# Altium PCB NBP14 Xilinx CoolRunner PQ208 Rev1.01.PcbDoc (part 2 of 2)
Units mm, origin at the board's own origin, x right, y up, seen from the top; angles counter-clockwise.
Board outline 69 x 80.99 mm, 2 copper layers (Top Layer, Bottom Layer); 33 components, 179 nets, 478 pads, 87 vias.
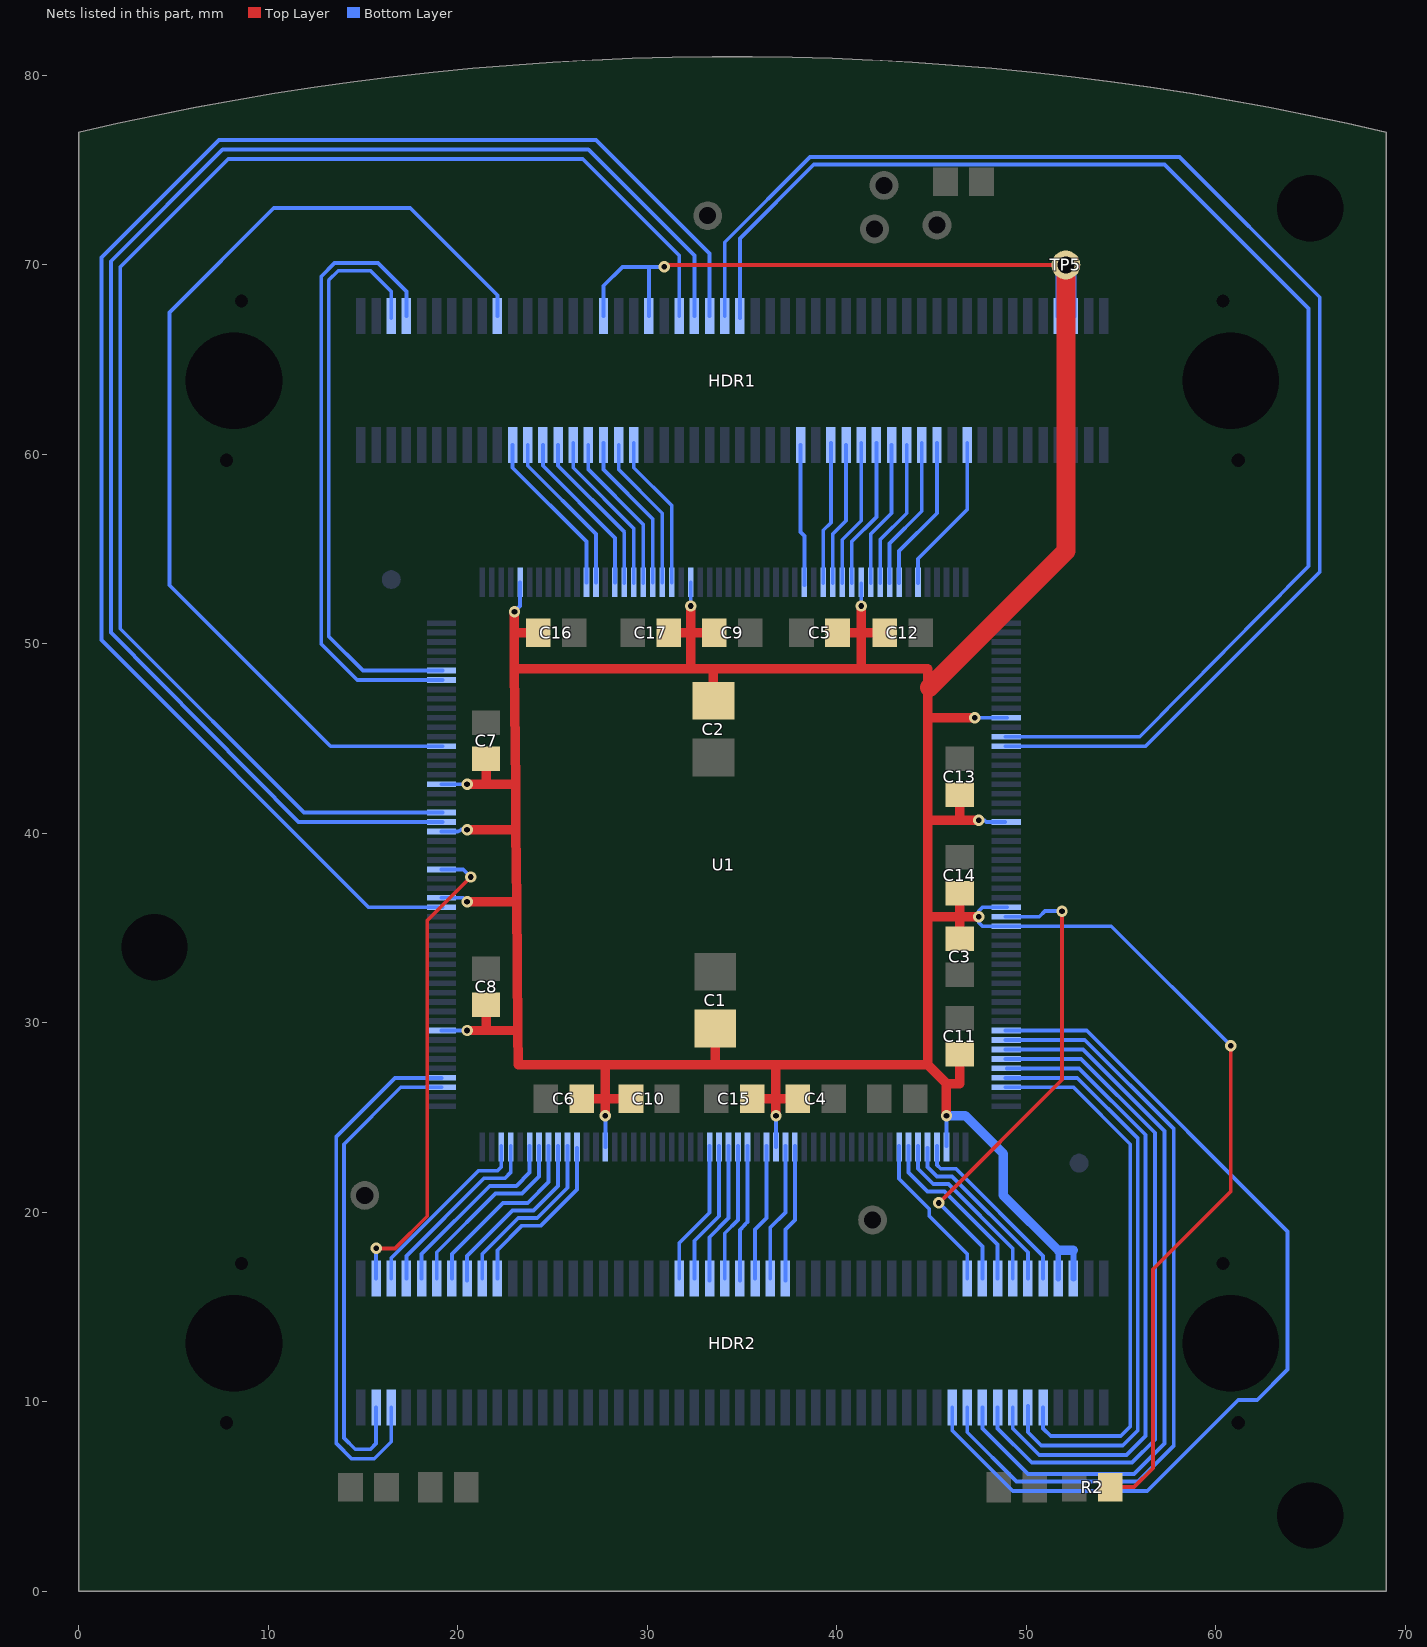
[diagram p2: the nets of this part, all layers, seen from the top]

## Via types
v1: diameter 0.6, hole 0.3, Top Layer to Bottom Layer, tented both sides, 85 vias
v2: diameter 0.9, hole 0.5, Top Layer to Bottom Layer, tented both sides, 2 vias

## Nets (pads, with @x,y where several pads share a name; then routed paths per layer and width w, separated by ;. In a path a pad name is that pad's centre, name@x,y a point inside that pad or via, vN(x,y) a via of type N, cw(c..) or ccw(c..) an arc to the next point about the centre after c; other vN are vias at no path point) (continued)
RAM_ADDR0: HDR1.21 U1.12 | length 8.9
  Bottom Layer w0.2: HDR1.21@22.9,60.5 22.9,59.3 26.8,55.4 U1.12@26.8,53.25
RAM_ADDR1: HDR1.25 U1.15 | length 8.8
  Bottom Layer w0.2: HDR1.25@24.5,60.5 24.5,59.4 28.3,55.6 U1.15@28.3,53.25
RAM_ADDR2: HDR1.29 U1.17 | length 8.7
  Bottom Layer w0.2: HDR1.29@26.1,60.6 HDR1.29@26.1,60.5 26.1,59.3 29.3,56.1 U1.17@29.3,53.2
RAM_ADDR3: HDR1.33 U1.19 | length 8.4
  Bottom Layer w0.2: HDR1.33@27.7,60.6 27.7,59.2 30.3,56.6 U1.19@30.3,53.25
RAM_ADDR4: HDR1.65 U1.38 | length 7.6
  Bottom Layer w0.2: U1.38@39.8,53.2 39.8,55.8 40.5,56.5 HDR1.65@40.5,60.5
RAM_ADDR5: HDR1.69 U1.40 | length 7.9
  Bottom Layer w0.2: U1.40@40.8,53.2 40.8,55.4 42.1,56.7 HDR1.69@42.1,60.6
RAM_ADDR6: HDR1.73 U1.43 | length 7.9
  Bottom Layer w0.2: U1.43@42.3,53.2 42.3,55.5 43.7,56.9 HDR1.73@43.7,60.5
RAM_ADDR7: HDR1.77 U1.45 | length 8.2
  Bottom Layer w0.2: U1.45@43.3,53.2 43.3,54.9 45.3,56.9 HDR1.77@45.3,60.5 HDR1.77@45.3,60.6
RAM_ADDR8: HDR1.75 U1.44 | length 8.1
  Bottom Layer w0.2: U1.44@42.8,53.2 42.8,55.3 44.5,57 HDR1.75@44.5,60.6
RAM_ADDR9: HDR1.71 U1.42 | length 7.8
  Bottom Layer w0.2: U1.42@41.8,53.2 41.8,55.8 42.9,56.9 HDR1.71@42.9,60.5
RAM_ADDR10: HDR1.67 U1.39 | length 7.8
  Bottom Layer w0.2: U1.39@40.3,53.2 40.3,55.5 41.3,56.5 HDR1.67@41.3,60.6
RAM_ADDR11: HDR1.63 U1.37 | length 7.6
  Bottom Layer w0.2: U1.37@39.3,53.2 39.3,56 39.7,56.4 HDR1.63@39.7,60.6
RAM_ADDR12: HDR1.59 U1.35 | length 7.5
  Bottom Layer w0.2: HDR1.59@38.1,60.5 38.1,55.9 38.3,55.7 U1.35@38.3,53.1
RAM_ADDR13: HDR1.35 U1.20 | length 8.2
  Bottom Layer w0.2: HDR1.35@28.5,60.5 28.5,59.2 30.8,56.9 U1.20@30.8,53.25
RAM_ADDR14: HDR1.31 U1.18 | length 8.5
  Bottom Layer w0.2: HDR1.31@26.9,60.5 26.9,59.2 29.8,56.3 U1.18@29.8,53.2
RAM_ADDR15: HDR1.27 U1.16 | length 8.7
  Bottom Layer w0.2: HDR1.27@25.3,60.5 25.3,59.4 28.8,55.9 U1.16@28.8,53.2
RAM_ADDR16: HDR1.23 U1.13 | length 8.7
  Bottom Layer w0.2: HDR1.23@23.7,60.5 23.7,59.4 27.3,55.8 U1.13@27.3,53.25
RAM_CS: HDR1.37 U1.21 | length 8.2
  Bottom Layer w0.2: HDR1.37@29.3,60.6 29.3,59.3 31.3,57.3 U1.21@31.3,53.25
RED0: HDR1.6 U1.203 | length 30.9
  Bottom Layer w0.2: HDR1.6@16.5,67.2 16.5,68.6 15.4,69.7 13.7,69.7 13.2,69.2 13.2,50.4 15,48.6 U1.203@19.2,48.6
RED1: HDR1.8 U1.202 | length 33.3
  Bottom Layer w0.2: HDR1.8@17.3,67.3 17.3,68.6 15.8,70.1 13.5,70.1 12.8,69.4 12.8,50 14.7,48.1 U1.202@19.2,48.1
REF_CLK: HDR2.4 U1.182 | length 25.7
  Top Layer w0.2: v1(15.7,18.1) 16.7,18.1 18.4,19.8 18.4,35.4 v1@20.8,37.8
  Bottom Layer w0.2: HDR2.4@15.7,16.5 v1(15.7,18.1) ; U1.182@19.15,38.1 20.3,38.1 v1(20.7,37.7)
SCL: HDR2.5 U1.160 | length 28.4
  Bottom Layer w0.2: HDR2.5@16.5,9.7 16.5,7.9 15.6,7 14.4,7 13.6,7.8 13.6,24 16.7,27.1 U1.160@19.15,27.1
SDA: HDR2.3 U1.159 | length 25.9
  Bottom Layer w0.2: HDR2.3@15.7,9.7 15.7,7.8 15.4,7.5 14.6,7.5 14,8.1 14,23.6 17,26.6 U1.159@19.15,26.6
SP0: HDR2.79 U1.96 | length 49.5
  Bottom Layer w0.2: HDR2.79@46.1,9.7 46.1,8.5 49.3,5.3 56.4,5.3 61.2,10.1 62.2,10.1 63.8,11.7 63.8,19 53.2,29.6 U1.96@48.9,29.6
SP1: HDR2.81 U1.97 | length 41.6
  Bottom Layer w0.2: HDR2.81@46.9,9.7 46.9,8.4 49.5,5.8 55.9,5.8 57.8,7.7 57.8,24.4 53.1,29.1 U1.97@48.9,29.1
SP2: HDR2.83 U1.98 | length 39
  Bottom Layer w0.2: HDR2.83@47.7,9.7 47.7,8.6 50.1,6.2 55.7,6.2 57.3,7.8 57.3,24.3 53,28.6 U1.98@48.9,28.6
SP3: HDR2.85 U1.99 | length 36.4
  Bottom Layer w0.2: HDR2.85@48.5,9.7 48.5,8.6 50.3,6.8 55.6,6.8 56.8,8 56.8,24.2 52.9,28.1 U1.99@48.9,28.1
SP4: HDR2.87 U1.100 | length 33.7
  Bottom Layer w0.2: U1.100@49,27.6 52.8,27.6 56.3,24.1 56.3,8.2 55.3,7.2 50.7,7.2 49.3,8.6 HDR2.87@49.3,9.7
SP5: HDR2.89 U1.101 | length 31.5
  Bottom Layer w0.2: U1.101@48.9,27.1 52.7,27.1 55.9,23.9 55.9,8.5 55.1,7.7 50.8,7.7 50.1,8.4 HDR2.89@50.1,9.8
SP6: HDR2.91 U1.102 | length 28.8
  Bottom Layer w0.2: U1.102@48.9,26.6 52.5,26.6 55.5,23.6 55.5,8.7 55,8.2 51.3,8.2 50.9,8.6 HDR2.91@50.9,9.7
SP7: HDR2.92 U1.108 | length 9.8
  Bottom Layer w0.2: U1.108@45.3,23.5 45.3,22.5 45.5,22.3 46.3,22.3 50.9,17.7 HDR2.92@50.9,16.5
SP8: HDR2.90 U1.109 | length 9.6
  Bottom Layer w0.2: U1.109@44.8,23.4 44.8,22.4 45.3,21.9 46.1,21.9 50.1,17.9 HDR2.90@50.1,16.5
SP9: HDR2.88 U1.110 | length 9.5
  Bottom Layer w0.2: U1.110@44.3,23.5 44.3,22.3 45.1,21.5 45.9,21.5 49.3,18.1 HDR2.88@49.3,16.5
SP10: HDR2.86 U1.111 | length 9.5
  Bottom Layer w0.2: U1.111@43.8,23.5 43.8,22.1 44.8,21.1 45.7,21.1 48.5,18.3 HDR2.86@48.5,16.5
SP11: HDR2.84 U1.84 | length 26.2
  Top Layer w0.2: v1(45.4,20.5) 51.9,27 v1(51.9,35.9)
  Bottom Layer w0.2: v1(45.4,20.5) 47.7,18.2 HDR2.84@47.7,16.5 ; U1.84@48.9,35.6 50.7,35.6 51,35.9 v1(51.9,35.9)
SP12: HDR2.82 U1.112 | length 8.5
  Bottom Layer w0.2: U1.112@43.3,23.5 43.3,21.774 44.89,20.184 44.89,19.81 46.9,17.8 HDR2.82@46.9,16.5
SPI_CLK: HDR1.46 U1.187 | length 80
  Bottom Layer w0.2: U1.187@19.2,40.6 11.6,40.6 1.7,50.6 1.7,70.2 7.6,76.1 26.9,76.1 32.5,70.5 HDR1.46@32.5,67.3
SPI_DIN: HDR1.44 U1.188 | length 77.3
  Bottom Layer w0.2: U1.188@19.2,41.1 11.9,41.1 2.2,50.8 2.2,69.9 7.9,75.6 26.6,75.6 31.7,70.5 HDR1.44@31.7,67.3
SPI_DOUT: HDR1.50 U1.66 | length 75.1
  Bottom Layer w0.2: HDR1.50@34.1,67.3 34.1,71.2 38.6,75.7 58.1,75.7 65.5,68.3 65.5,53.8 56.3,44.6 U1.66@48.9,44.6
SPI_MODE: HDR1.52 U1.65 | length 72.3
  Bottom Layer w0.2: HDR1.52@34.9,67.2 34.9,71.4 38.8,75.3 57.3,75.3 64.9,67.7 64.9,54.1 56,45.1 U1.65@48.9,45.1
SPI_SEL: HDR1.48 U1.178 | length 84.5
  Bottom Layer w0.2: U1.178@19.2,36.1 15.3,36.1 1.2,50.2 1.2,70.4 7.4,76.6 27.3,76.6 33.3,70.6 HDR1.48@33.3,67.3
SW0: HDR2.44 U1.132 | length 7.7
  Bottom Layer w0.2: HDR2.44@31.7,16.5 31.7,18.385 33.307,19.993 ; 33.3,20 U1.132@33.3,23.5
SW1: HDR2.46 U1.131 | length 7.5
  Bottom Layer w0.2: HDR2.46@32.5,16.5 32.5,18.5 33.8,19.8 U1.131@33.8,23.5
SW2: HDR2.48 U1.130 | length 7.5
  Bottom Layer w0.2: HDR2.48@33.3,16.4 33.3,18.691 34.3,19.7 U1.130@34.3,23.5
SW3: HDR2.50 U1.129 | length 7.3
  Bottom Layer w0.2: HDR2.50@34.1,16.5 34.1,18.9 34.8,19.6 U1.129@34.8,23.5
SW4: HDR2.52 U1.128 | length 7.3
  Bottom Layer w0.2: HDR2.52@34.9,16.4 34.9,19.077 35.3,19.5 U1.128@35.3,23.5
SW5: HDR2.54 U1.126 | length 7.2
  Bottom Layer w0.2: HDR2.54@35.7,16.5 35.7,19.1 36.3,19.7 U1.126@36.3,23.5
SW6: HDR2.56 U1.124 | length 7.3
  Bottom Layer w0.2: HDR2.56@36.5,16.5 36.5,19.2 37.3,20 U1.124@37.3,23.5
SW7: HDR2.58 U1.123 | length 7.3
  Bottom Layer w0.2: HDR2.58@37.3,16.4 37.3,19.1 37.8,19.6 U1.123@37.8,23.5
SWC0: HDR2.18 U1.147 | length 9.4
  Bottom Layer w0.2: HDR2.18@21.3,16.5 21.3,17.8 23.2,19.7 24.2,19.7 25.8,21.3 U1.147@25.8,23.5
SWC1: HDR2.16 U1.148 | length 9.7
  Bottom Layer w0.2: HDR2.16@20.5,16.4 20.5,17.7 22.9,20.1 24,20.1 25.3,21.4 U1.148@25.3,23.5
SWC2: HDR2.14 U1.149 | length 9.9
  Bottom Layer w0.2: HDR2.14@19.7,16.5 19.7,17.8 22.4,20.5 23.7,20.5 24.8,21.6 U1.149@24.8,23.5
SWC3: HDR2.6 U1.154 | length 10
  Bottom Layer w0.2: HDR2.6@16.5,16.5 16.5,17.6 21.1,22.2 22.1,22.2 22.3,22.4 U1.154@22.3,23.5
SWR0: HDR2.20 U1.146 | length 9.2
  Bottom Layer w0.2: HDR2.20@22.1,16.5 22.1,18 23.4,19.3 24.4,19.3 26.3,21.2 U1.146@26.3,23.4
SWR1: HDR2.12 U1.150 | length 10.1
  Bottom Layer w0.2: HDR2.12@18.9,16.5 18.9,17.9 22,21 23.4,21 24.3,21.9 U1.150@24.3,23.5
SWR2: HDR2.10 U1.151 | length 10.2
  Bottom Layer w0.2: HDR2.10@18.1,16.5 18.1,17.8 21.7,21.4 23.1,21.4 23.8,22.1 U1.151@23.8,23.5
SWR3: HDR2.8 U1.153 | length 9.9
  Bottom Layer w0.2: HDR2.8@17.3,16.5 17.3,17.7 21.4,21.8 22.5,21.8 22.8,22.1 U1.153@22.8,23.5
TEST: HDR1.81 U1.47 | length 8.5
  Bottom Layer w0.2: U1.47@44.3,53.2 44.3,54.5 46.9,57.1 HDR1.81@46.9,60.5 HDR1.81@46.9,60.6
VCC: C1.1 C2.1 C3.1 C4.1 C5.1 C6.1 C7.1 C8.1 C9.1 C10.1 C11.1 C12.1 C13.1 C14.1 C15.1 C16.1 C17.1 HDR1.34 HDR1.40 HDR1.94 HDR1.96 HDR2.94 HDR2.96 R2.1 TP5.1 U1.5 U1.23 U1.41 U1.63 U1.74 U1.83 U1.85 U1.107 U1.125 U1.143 U1.165 U1.179 U1.186 U1.191 | length 281.7
  Top Layer w0.2: v1(30.9,69.9) 31,70 31.3,70 TP5.1@52.2,70 ; R2.1@54.4,5.5 55.7,5.5 56.7,6.5 56.7,17 60.8,21.1 v1(60.8,28.8)
  Top Layer w0.5: v1(20.5,29.6) 23.182,29.6 ; v1(20.5,36.4) 23.117,36.4 ; v1(20.5,40.2) 23.081,40.2 ; v1(20.5,42.6) 23.058,42.6 ; 21.5,29.6 C8.1@21.5,30.9 ; 21.5,42.6 C7.1@21.5,44 ; 23,50.6 C16.1@24.3,50.6 ; v1(23,51.7) 23,48.7 ; C6.1@26.5,26 27.8,26 C10.1@29.2,26 ; v1(27.8,25.1) 27.8,27.7 ; C17.1@31.1,50.6 C9.1@33.6,50.6 ; 32.3,48.7 32.3,50.6 v1(32.3,52) ; C2.1@33.5,46.9 33.5,48.7 ; 33.6,27.8 C1.1@33.6,29.7 ; C15.1@35.5,26 C4.1@38,26 ; v1(36.8,25.1) 36.8,27.8 ; C5.1@40.1,50.6 C12.1@42.6,50.6 ; 41.3,48.7 v1(41.3,52) ; 44.8,35.6 v1(47.5,35.6) ; 44.8,40.7 v1(47.5,40.7) ; 44.8,46.1 v1(47.3,46.1) ; v1(45.8,25.1) 45.8,26.8 ; C11.1@46.5,28.3 46.5,26.8 45.8,26.8 ; C3.1@46.5,34.4 C14.1@46.5,36.8 ; 46.5,40.7 C13.1@46.5,42 ; 23,48.7 44.8,48.7 44.8,27.8 ; 23,48.7 23.058,42.6 ; 23.058,42.6 23.081,40.2 ; 23.081,40.2 23.117,36.4 ; 23.117,36.4 23.182,29.6 ; 23.182,29.6 23.2,27.8 44.8,27.8 ; 44.8,27.8 45.8,26.8
  Top Layer w1: 44.9,47.7 52.1,54.9 TP5.1@52.1,70
  Bottom Layer w0.2: U1.165@19.15,29.6 v1(20.5,29.6) ; U1.179@19.15,36.6 20.3,36.6 v1(20.5,36.4) ; U1.186@19.15,40.1 20,40.1 20.2,40.2 v1(20.5,40.2) ; U1.191@19.15,42.6 v1(20.5,42.6) ; v1(23,51.7) 23.3,52 U1.5@23.3,53.25 ; HDR1.34@27.7,67.3 27.7,68.9 28.7,69.9 30.1,69.9 ; U1.143@27.8,23.45 v1(27.8,25.1) ; HDR1.40@30.1,67.3 30.1,67.6 30.1,69.9 ; v1(30.9,69.9) 30.1,69.9 ; v1(32.3,52) U1.23@32.3,53.25 ; U1.125@36.8,23.45 v1(36.8,25.1) ; v1(41.3,52) U1.41@41.3,53.2 ; U1.107@45.8,23.5 v1(45.8,25.1) ; v1(47.3,46.1) U1.63@49,46.1 ; v1(47.5,40.7) 47.8,40.7 47.9,40.6 U1.74@48.9,40.6 ; U1.83@49,36.1 47.7,36.1 47.5,35.9 47.5,35.3 47.7,35.1 54.5,35.1 v1(60.8,28.8)
  Bottom Layer w0.3: HDR2.94@51.7,16.5 51.7,18 ; HDR1.94@51.7,67.3 TP5.1@51.7,70 ; HDR2.96@52.5,16.5 52.5,18 ; HDR1.96@52.5,67.3 TP5.1@52.5,70
  Bottom Layer w0.5: v1(45.8,25.1) 46.8,25.1 48.8,23.1 48.8,20.9 51.7,18 52.5,18
VDRIVE: HDR1.20 U1.195 | length 54.9
  Bottom Layer w0.2: U1.195@19.2,44.6 13.3,44.6 4.8,53.1 4.8,67.5 10.3,73 17.5,73 22.1,68.4 HDR1.20@22.1,67.3
pads on no net: HDR1.91 HDR1.93 HDR1.95 HDR1.97 HDR1.99 HDR1.MH1 HDR1.MH2 HDR1.MH3 HDR1.MH4 HDR1.MH5 HDR1.MH6 HDR2.76 HDR2.78 HDR2.80 HDR2.93 HDR2.95 HDR2.97 HDR2.99 HDR2.MH1 HDR2.MH2 HDR2.MH3 HDR2.MH4 HDR2.MH5 HDR2.MH6 U1.1 U1.2 U1.51 U1.52 U1.53 U1.54 U1.103 U1.104 U1.105 U1.106 U1.155 U1.156 U1.157 U1.158 U1.207 U1.208

## Polygon pours and split planes (outlines as drawn)
VCC on Top Layer "Top Layer-VCC" (solid, remove dead copper, pour order 1001): 21.6,50.3 46.5,50.3 46.5,26.1 21.6,26.1
GND on Top Layer "Top Layer-GND" (solid, remove dead copper, pour order 1000): 0,0 69,0 69,81 0,81
GND on Bottom Layer "Bottom Layer-GND" (solid, remove dead copper, pour order 1002): 0,0 69,0 69,81 0,81

## Keep-outs
Bottom Layer:
  circle w0.2: c16.5,53.4 r2
  circle w0.2: c52.8,22.6 r2
Keep-Out Layer:
  lines w1.8: 68.999,77 ccw(c34.5,-69.801) 0.001,77 0,0 69,0 ; 69.1,0 69.1,77

## Other copper
Bottom Layer:
  rectangle net VCC: 51.6,68.6 52.6,70.6

## Silkscreen, mask and mechanical layers (free items; w line width, h text height)
Top Overlay:
  circle w0.127: c65,73 r2.5
  circle w0.127: c65,4 r2.5
  circle w0.127: c4,34 r2.5
  lines w0.127: 0,1.5 1.5,1.5 1.5,0 ; 0,22.3 1.5,22.3 1.5,23.4 0,23.4 ; 0.001,53.6 1.501,53.6 1.501,54.7 0.001,54.7 ; 0,75.5 1.5,75.5 1.5,77.3 ; 15.7,79.8 15.7,78.1 17,78.1 17,79.9 ; 49.7,80.2 49.7,78.7 51,78.7 51,80.1 ; 67.5,0 67.5,1.5 69,1.5 ; 67.5,77.3 67.5,75.5 69,75.5 ; 68.999,22.3 67.5,22.3 67.5,23.4 69,23.4 ; 69,53.6 67.501,53.6 67.501,54.7 69.001,54.7
  text "PROGRAM" at 16.9,3.1 h0.8
  text "POWER" at 47.6,3.1 h0.8
Bottom Overlay:
  drawing of 852 lines, arcs and shapes, not listed
  text "REV 1.01" at 47.7,76.5 h1.3
  text "NBP14" at 54.9,76.5 h1.3
PCB Boundary:
  the board outline again, w0.25
  text "PCB boundary coincides with centre-line of tracks and arc" at 0,-12 h0.75
Gerber ID:
  text ".Layer_Name" at 0,-6 h0.75
Printout ID:
  text ".Printout_Name" at 0,-10 h0.75
Design Information:
  drawing of 719 lines, arcs and shapes, not listed
  text "NBP14 REV 1.01" at 317.627,202.041 h1.27
  text "DESIGN INFORMATION" at 261.62,201.914 h1.52
  text "BOARD NAME:" at 299.212,201.914 h1.52
  text "BOARD TECHNOLOGY" at 261.62,199.374 h1.52
  text "BOARD SIZE (REFER ALSO PROFILING INFORMATION)" at 309.88,199.374 h1.27
  text "69.00mm" at 312.6,197.1 h1.52
  text "11.811" at 277.419,197.012 h1.52
  text "81.00mm" at 335.6,197 h1.52
  text "7.874" at 291.389,196.885 h1.52
  text "7.874" at 264.446,196.834 h1.52
  text "X" at 328.549,196.326 h1.78
  text "(MIN. TRACK/   PADS  /   CLEARANCE     IN 0.001'')" at 260.096,194.294 h1.27
  text "MINIMUM ANNULAR RING 0.05MM (0.002'') EXTERNAL PER IPC-2221 CLASS 3 LEVEL C AND IS THE" at 261.62,191.754 h1.27
  text "MANUFACTURING REGISTRATION ALLOWANCE" at 261.62,189.468 h1.27
  text "LAND SIZE CALCULATION MINIMUM - NOMINAL HOLE SIZE + 0.508MM (0.020'')" at 261.62,186.674 h1.27
  text "AS INSTRUCTED" at 347.65,182.28 h1.52
  text "X" at 299.263,182.153 h1.52
  text "CIRCUIT TYPE:" at 261.62,182.102 h1.52
  text "SS" at 284.48,182.102 h1.27
  text "DS" at 302.26,182.102 h1.27
  text "X" at 316.865,182.102 h1.52
  text "PTH" at 320.04,182.102 h1.27
  text "ML" at 330.962,182.102 h1.27
  text "No. OFF" at 337.82,182.102 h1.27
  text "FINGER CONNECTOR DIM PER:" at 261.62,179.054 h1.52
  text "AS SHOWN" at 337.82,179.054 h1.27
  text "No. OFF TOTAL" at 278.384,176.26 h1.52
  text "ONE SIDE" at 320.04,176.26 h1.27
  text "BOTH SIDES" at 337.82,176.006 h1.27
  text "VIAS:" at 261.62,173.339 h1.52
  text "NONE" at 273.05,173.339 h1.14
  text "X" at 281.432,173.339 h1.52
  text "FEED THRU'" at 284.48,173.339 h1.14
  text "X" at 299.212,173.339 h1.52
  text "TENTED" at 302.26,173.339 h1.14
  text "BURIED LAYER SEQUENCE" at 320.04,173.339 h1.14
  text "UNIQUE DRILL" at 284.48,170.291 h1.14
  text "2 SIZE" at 302.26,170.291 h1.14
  text "BLIND LAYER SEQUENCE" at 320.04,170.291 h1.14
  text "Layer Stack Manager (Protel)" at 297.053,168.005 h1.27
  text "X" at 334.772,168.005 h1.52
  text "AS SHOWN" at 337.82,168.005 h1.27
  text "LAYER CONSTRUCTION PER:" at 261.62,167.878 h1.52
  text "Protel" at 342.646,165.338 h1.27
  text "(PFW)" at 352.933,165.211 h1.27
  text "ARTWORK:" at 261.62,165.084 h1.52
  text "MANUAL" at 284.48,165.084 h1.27
  text "DIGITISED" at 302.26,165.084 h1.27
  text "X" at 316.992,165.084 h1.52
  text "CAD" at 320.04,165.084 h1.27
  text "TYPE" at 330.962,165.084 h1.27
  text "ARTWORK/PATTERN MASTER LIST" at 261.62,160.385 h1.52
  text "DESCRIPTION" at 262.89,157.972 h1.27
  text "DRAWING No./CAD FILE REF." at 281.559,157.972 h1.27
  text "LAYER NAME" at 322.834,157.972 h1.27
  text "GERBER FILE REF" at 343.586,157.896 h1.27
  text "PCB FILE" at 261.366,155.432 h1.27
  text "BOCD_CoolRunner_XPLA3_PQ208" at 281.237,155.356 h1.14
  text "PcbDoc" at 312.979,155.356 h1.02
  text "Top Paste Mask" at 321.158,152.892 h1.02
  text "GTP" at 363.779,152.816 h1.27
  text "GERBER FILE" at 261.366,152.765 h1.27
  text "GTO" at 363.728,150.327 h1.27
  text "Top Overlay" at 321.158,150.301 h1.02
  text "GERBER FILE" at 261.366,150.225 h1.27
  text "Top Solder Mask" at 321.158,147.863 h1.02
  text "GTS" at 363.779,147.736 h1.27
  text "GERBER FILE" at 261.366,147.685 h1.27
  text "TOP LAYER" at 321.158,145.272 h1.02
  text "GTL" at 363.779,145.196 h1.27
  text "GERBER FILE" at 261.366,145.145 h1.27
  text "BOTTOMLAYER" at 321.158,142.732 h1.02
  text "GBL" at 363.779,142.656 h1.27
  text "GERBER FILE" at 261.366,142.605 h1.27
  text "Bottom Solder Mask" at 321.158,140.243 h1.02
  text "GBS" at 363.779,140.116 h1.27
  text "GERBER FILE" at 261.366,140.065 h1.27
  text "Bottom Overlay" at 321.158,137.652 h1.02
  text "GBO" at 363.779,137.576 h1.27
  text "GERBER FILE" at 261.366,137.525 h1.27
  text "Bottom Paste Mask" at 321.158,135.163 h1.02
  text "GBP" at 363.779,135.036 h1.27
  text "GERBER FILE" at 261.366,134.985 h1.27
  text "PCB Boundary" at 321.158,132.572 h1.02
  text "GM1" at 363.779,132.496 h1.27
  text "GERBER FILE" at 261.366,132.445 h1.27
  text "APERTURE LIST" at 261.366,130.032 h1.27
  text "APR" at 313.979,129.956 h1.27
  text "DRILL REPORT" at 261.366,127.492 h1.27
  text "DRR" at 313.979,127.416 h1.27
  text "EXCELLON DRILL" at 261.366,124.952 h1.27
  text "TXT" at 313.979,124.876 h1.27
  text "MATERIAL:" at 261.62,99.298 h1.52
  text "GLASS FIBRE EPOXY RESIN NEMA GRADE FR4 (MIL-S-13949H)" at 287.274,99.044 h1.27
  text "X" at 284.607,98.917 h1.52
  text "THICKNESS:" at 269.494,96.123 h1.27
  text "0.8mm" at 287.274,96.123 h1.27
  text "1.2mm" at 304.927,96.123 h1.27
  text "1.6mm" at 322.58,96.123 h1.27
  text "2.4mm" at 340.36,96.123 h1.27
  text "3.2mm" at 358.14,96.123 h1.27
  text "X" at 320.167,95.996 h1.52
  text "TOLERANCE:" at 269.367,93.075 h1.27
  text "IN A/W IPC-D-300G CLASS" at 287.02,93.075 h1.27
  text "3 LEVEL B" at 321.945,93.075 h1.27
  text "OTHER +/-" at 340.36,93.075 h1.27
  text "X" at 284.607,92.948 h1.52
  text "BOW & TWIST:" at 266.954,90.027 h1.27
  text "IN A/W IPC-D-300G CLASS" at 287.02,90.027 h1.27
  text "3 LEVEL B" at 321.945,90.027 h1.27
  text "AS SHOWN" at 340.487,89.9 h1.27
  text "X" at 284.607,89.773 h1.52
  text "COPPER THICKNESS (FINISHED)" at 269.367,86.725 h1.27
  text "OUTER:" at 274.193,84.439 h1.27
  text "18um" at 287.274,84.439 h1.27
  text "35um" at 314.325,84.439 h1.27
  text "70um" at 340.614,84.439 h1.27
  text "X" at 311.582,84.236 h1.52
  text "INNER SIGNAL:" at 265.811,81.391 h1.27
  text "18um" at 287.274,81.391 h1.27
  text "35um" at 314.325,81.391 h1.27
  text "70um" at 340.614,81.391 h1.27
  text "INNER PWR:" at 269.494,78.343 h1.27
  text "18um" at 287.274,78.343 h1.27
  text "35um" at 314.325,78.343 h1.27
  text "70um" at 340.614,78.343 h1.27
  text "STRUCTURE:" at 261.62,75.295 h1.52
  text "REFER" at 287.274,75.295 h1.27
  text "AS PER DRAWING No." at 287.147,72.12 h1.27
  text "AS SHOWN" at 340.487,72.12 h1.27
  text "X" at 337.947,71.993 h1.52
  text "DRILLING:" at 261.62,69.326 h1.52
  text "VIEWED FROM:" at 266.573,67.04 h1.27
  text "COMPONENT SIDE" at 287.274,67.04 h1.14
  text "SOLDER SIDE" at 314.071,67.04 h1.14
  text "X" at 284.607,66.786 h1.52
  text "REFERENCE:" at 268.859,63.992 h1.27
  text "AS SHOWN" at 287.147,63.865 h1.14
  text "PATTERN MASTER LIST" at 314.198,63.865 h1.14
  text "X" at 337.947,63.865 h1.52
  text "NC_DRILL FILES" at 340.487,63.865 h1.14
  text "X" at 284.607,63.738 h1.52
  text "PTH MINIMUM COPPER THICKNESS:" at 274.701,60.944 h1.27
  text "20um" at 314.325,60.944 h1.27
  text "X" at 311.658,60.817 h1.52
  text "OTHER" at 340.487,60.817 h1.27
  text "NPTH:" at 275.209,57.896 h1.27
  text "TENTED" at 287.147,57.769 h1.14
  text "X" at 311.658,57.769 h1.52
  text "PADS REMOVED" at 314.198,57.769 h1.14
  text "REMOVE PADS" at 340.487,57.769 h1.14
  text "X" at 284.607,57.642 h1.52
  text "2nd DRILL" at 287.147,54.721 h1.14
  text "BOTH" at 314.198,54.721 h1.14
  text "AS SHOWN" at 326.517,54.721 h1.14
  text "NONE" at 340.487,54.721 h1.14
  text "BOARD FINISH:" at 261.62,51.8 h1.52
  text "X" at 284.607,51.673 h1.52
  text "ETCHING" at 287.147,51.673 h1.14
  text "REFER PATTERN MASTER LIST" at 314.198,51.673 h1.14
  text "LEGEND / SCREEN PRINT:" at 281.94,48.752 h1.27
  text "NONE" at 314.198,48.625 h1.14
  text "COMPONENT" at 326.517,48.625 h1.14
  text "SOLDER" at 340.487,48.625 h1.14
  text "X" at 323.977,48.498 h1.52
  text "X" at 337.947,48.498 h1.52
  text "COLOUR:" at 272.161,45.704 h1.27
  text "WHITE" at 287.147,45.577 h1.14
  text "YELLOW" at 314.198,45.577 h1.14
  text "OTHER" at 340.487,45.577 h1.14
  text "X" at 284.607,45.45 h1.52
  text "X" at 284.607,42.529 h1.52
  text "LIQUID PHOTOIMAGEABLE" at 287.147,42.529 h1.14
  text "SCREEN PRINT" at 326.517,42.529 h1.14
  text "MATTE" at 287.147,39.481 h1.14
  text "GLOSS" at 299.847,39.481 h1.14
  text "GREEN" at 314.198,39.481 h1.14
  text "BLUE" at 326.517,39.481 h1.14
  text "G/Y" at 340.487,39.481 h1.14
  text "OTHER" at 351.917,39.481 h1.14
  text "X" at 297.18,39.354 h1.52
  text "SOLDER MASK COLOUR:" at 261.62,36.56 h1.14
  text "BLACK" at 287.147,36.433 h1.14
  text "GREEN" at 299.847,36.433 h1.14
  text "YELLOW" at 314.198,36.433 h1.14
  text "BLUE" at 326.517,36.433 h1.14
  text "OTHER" at 340.487,36.433 h1.14
  text "X" at 284.48,36.306 h1.52
  text "TRACK FINISH:" at 261.62,33.512 h1.52
  text "SELECTIVE SOLDER (HASL)" at 287.147,33.385 h1.14
  text "REFLOW SOLDER" at 326.517,33.385 h1.14
  text "SELECTIVE GOLD" at 287.147,30.337 h1.14
  text "um  (AREA" at 314.198,30.337 h1.14
  text "sq. mm)" at 342.011,30.337 h1.14
  text "X" at 284.607,27.289 h1.52
  text "IMMERSION GOLD" at 287.147,27.289 h1.14
  text "OTHER" at 326.517,27.289 h1.14
  text "EDGE BOARD" at 261.62,24.368 h1.52
  text "1.3um HARD GOLD OVER 5um     NICKEL / TIN-NICKEL" at 287.147,24.241 h1.14
  text "CONTACTS:" at 261.62,22.209 h1.52
  text "HARD FINISH GOLDE PLATE" at 287.147,21.193 h1.14
  text "OTHER" at 326.517,21.193 h1.14
  text "AS SHOWN" at 287.147,18.145 h1.14
  text "REFER" at 326.517,18.145 h1.14
  text "PROFILING:" at 261.62,15.097 h1.52
  text "AS DIMENSIONED, MEASURED AND CUT FROM SPECIFIED DATUM." at 287.147,15.097 h1.14
  text "X" at 284.607,14.97 h1.52
  text "REFER PCB BLANK DWG No." at 287.274,12.176 h1.27
  text "USE PROFILE / ROUTE TAPE SUPPLIED (REFER PATTERN MASTER LIST)" at 287.274,9.128 h1.27
  text "SQUARE CUT" at 287.274,6.08 h1.27
  text "N.C. ROUTE" at 305.054,6.08 h1.27
  text "V. SCORE" at 322.834,6.08 h1.27
  text "BLANK" at 340.614,6.08 h1.27
  text "ACCEPTABILITY:" at 261.62,3.413 h1.52
  text "MATERIALS AND WORKMANSHIP FOR ALL PRINTED WIRING BOARDS TO MEET" at 283.845,3.286 h1.27
  text "OR EXCEED THE REQUIREMENTS OF:" at 283.845,0.492 h1.27
  text "IPC-6011/12 AND IPC-A-600E" at 287.401,-2.175 h1.27
  text "1" at 322.961,-2.175 h1.27
  text "2" at 331.851,-2.175 h1.27
  text "X" at 329.184,-2.302 h1.52
  text "X" at 284.734,-2.429 h1.52
  text "3" at 340.741,-4.334 h1.27
  text "UL CERTIFICATION" at 287.401,-5.223 h1.27
  text "AUSTEL" at 322.961,-5.223 h1.27
  text "X" at 284.734,-5.35 h1.52
  text "ML-P-55110F GRP" at 286.893,-8.271 h1.02
  text "A" at 305.181,-8.271 h1.27
  text "B" at 314.071,-8.271 h1.27
  text "AS2546" at 322.961,-8.271 h1.27
  text "OTHER" at 340.741,-8.271 h1.27
  text "ADDITIONAL" at 261.62,-11.192 h1.52
  text "NONE" at 287.401,-11.446 h1.27
  text "SAMPLE PLAN" at 305.181,-11.446 h1.27
  text "MIL-P-55110E SERIAL Nos. PER ORDER" at 322.961,-11.446 h1.27
  text "REQUIREMENTS:" at 261.62,-13.605 h1.52
  text "NONE" at 287.401,-14.494 h1.27
  text "ML-P-55110F GRP" at 304.673,-14.494 h1.02
  text "A" at 322.961,-14.494 h1.27
  text "B" at 331.851,-14.494 h1.27
  text "IPC CLASS:" at 337.82,-14.494 h1.27
  text "1" at 353.314,-14.494 h1.27
  text "2" at 359.664,-14.494 h1.27
  text "3" at 366.014,-14.494 h1.27
  text "QUALITY RELEASE REPORT" at 305.181,-17.542 h1.27
  text "OTHER" at 345.694,-17.542 h1.27
  text "PER ORDER" at 354.203,-17.669 h1.27
  text "X" at 343.027,-17.796 h1.52
  text "NONE" at 305.181,-20.59 h1.27
  text "REQUIRED" at 322.961,-20.59 h1.27
  text "PER ORDER" at 345.821,-20.59 h1.27
  text "ELECTRICAL TEST:" at 261.62,-20.717 h1.52
  text "X" at 320.294,-20.717 h1.52
  text "NONE" at 305.181,-23.638 h1.27
  text "1 SIDE" at 322.834,-23.638 h1.14
  text "2 SIDES" at 334.01,-23.638 h1.14
  text "MIN. PITCH" at 345.694,-23.638 h1.27
  text "0.65mm" at 359.283,-23.638 h1.27
  text "SURFACE MOUNT:" at 261.62,-23.765 h1.52
  text "X" at 331.775,-23.841 h1.52
  text "NONE" at 305.181,-26.686 h1.27
  text "FOIL" at 322.961,-26.686 h1.27
  text "LEGEND" at 334.391,-26.686 h1.27
  text "REFER" at 345.694,-26.686 h1.27
  text "MANUFACTURER'S ID/LOGO:" at 261.62,-26.813 h1.52
  text "ISO9001/AS3901" at 308.991,-29.734 h1.27
  text "NONE" at 345.694,-29.734 h1.27
  text "MANUFACTURER'S ACCREDITATION:" at 261.62,-29.861 h1.52
  text "X" at 306.324,-29.861 h1.52
  text "PER ORDER" at 305.181,-32.782 h1.27
  text "REFER" at 322.961,-32.782 h1.27
  text "PACKAGING AND HANDLING:" at 261.62,-32.909 h1.52
  text "X" at 302.514,-33.036 h1.52
Sheet:
  drawing of 1882 lines, arcs and shapes, not listed
  text "1" at 3.717,207.391 h1.78
  text "2" at 52.756,207.391 h1.78
  text "3" at 102.015,207.391 h1.78
  text "4" at 151.308,207.391 h1.78
  text "5" at 200.584,207.391 h1.78
  text "6" at 249.606,207.391 h1.78
  text "7" at 299.136,207.391 h1.78
  text "8" at 348.158,207.391 h1.78
  text "A" at -18.415,173.406 h1.78
  text "A" at 370.205,173.406 h1.78
  text "B" at -18.415,102.794 h1.78
  text "B" at 370.205,102.794 h1.78
  text "C" at -18.415,32.182 h1.78
  text "C" at 370.205,32.182 h1.78
  text "D" at -18.415,-37.922 h1.78
  text "D" at 370.205,-37.922 h1.78
  text "ENGINEER:" at 255.27,-38.1 h1.14
  text "TITLE:" at 293.37,-38.1 h1.14
  text "PCB DESIGNER:" at 255.27,-45.593 h1.14
  text "DATE:" at 255.27,-53.34 h1.14
  text "PART NO.:" at 293.37,-53.34 h1.14
  text "REV:" at 346.71,-53.34 h1.14
  text "Altium Limited" at 222.25,-55.88 h1.78
  text ".PRINT_DATE" at 256.54,-56.388 h1.78
  text "12a Rodborough Rd" at 222.25,-58.42 h1.78
  text "Frenchs Forest" at 222.25,-60.96 h1.78
  text "FILE NAME:" at 255.27,-60.96 h1.14
  text "DWG NO:" at 293.37,-60.96 h1.14
  text "SCALE:" at 346.71,-60.96 h1.14
  text "NSW 2086" at 222.25,-63.5 h1.78
  text ".PCB_FILE_NAME_NO_PATH" at 256.54,-64.008 h1.78
  text "1" at 3.717,-69.469 h1.78
  text "2" at 52.756,-69.469 h1.78
  text "3" at 102.015,-69.469 h1.78
  text "4" at 151.308,-69.469 h1.78
  text "5" at 200.584,-69.469 h1.78
  text "6" at 249.606,-69.469 h1.78
  text "7" at 299.136,-69.469 h1.78
  text "8" at 348.158,-69.469 h1.78
Drill Drawing:
  text ".Legend" at 0,-8 h0.75

## Dimensions
34.5,-69.801 to 34.5,84 on Dimensions
0,0 to 0.001,77 on Dimensions
0,0 to 69,0 on Dimensions